# Altium PCB PCB.PcbDoc
Units mil, origin at the board's own origin, x right, y up, seen from the top; angles counter-clockwise.
Board outline 6000 x 4000 mil, 2 copper layers (Top Layer, Bottom Layer); 93 components, 67 nets, 259 pads, 0 vias.
Unrouted connection lines stored in the file: 183.
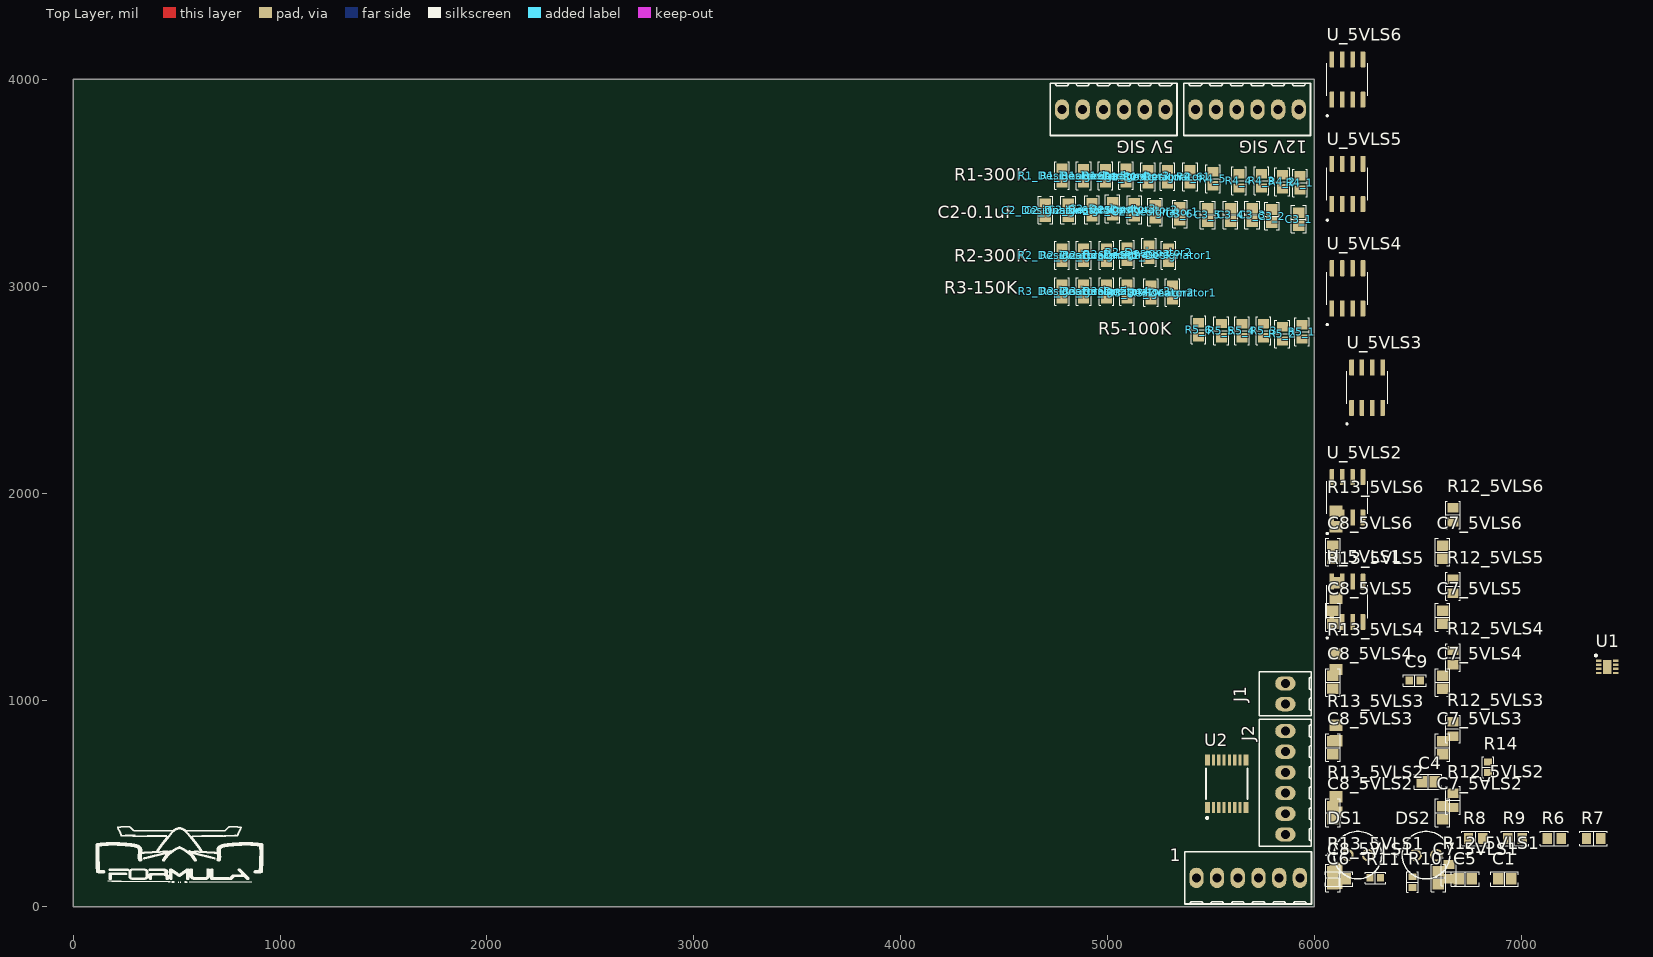
[diagram p0: Top Layer view]
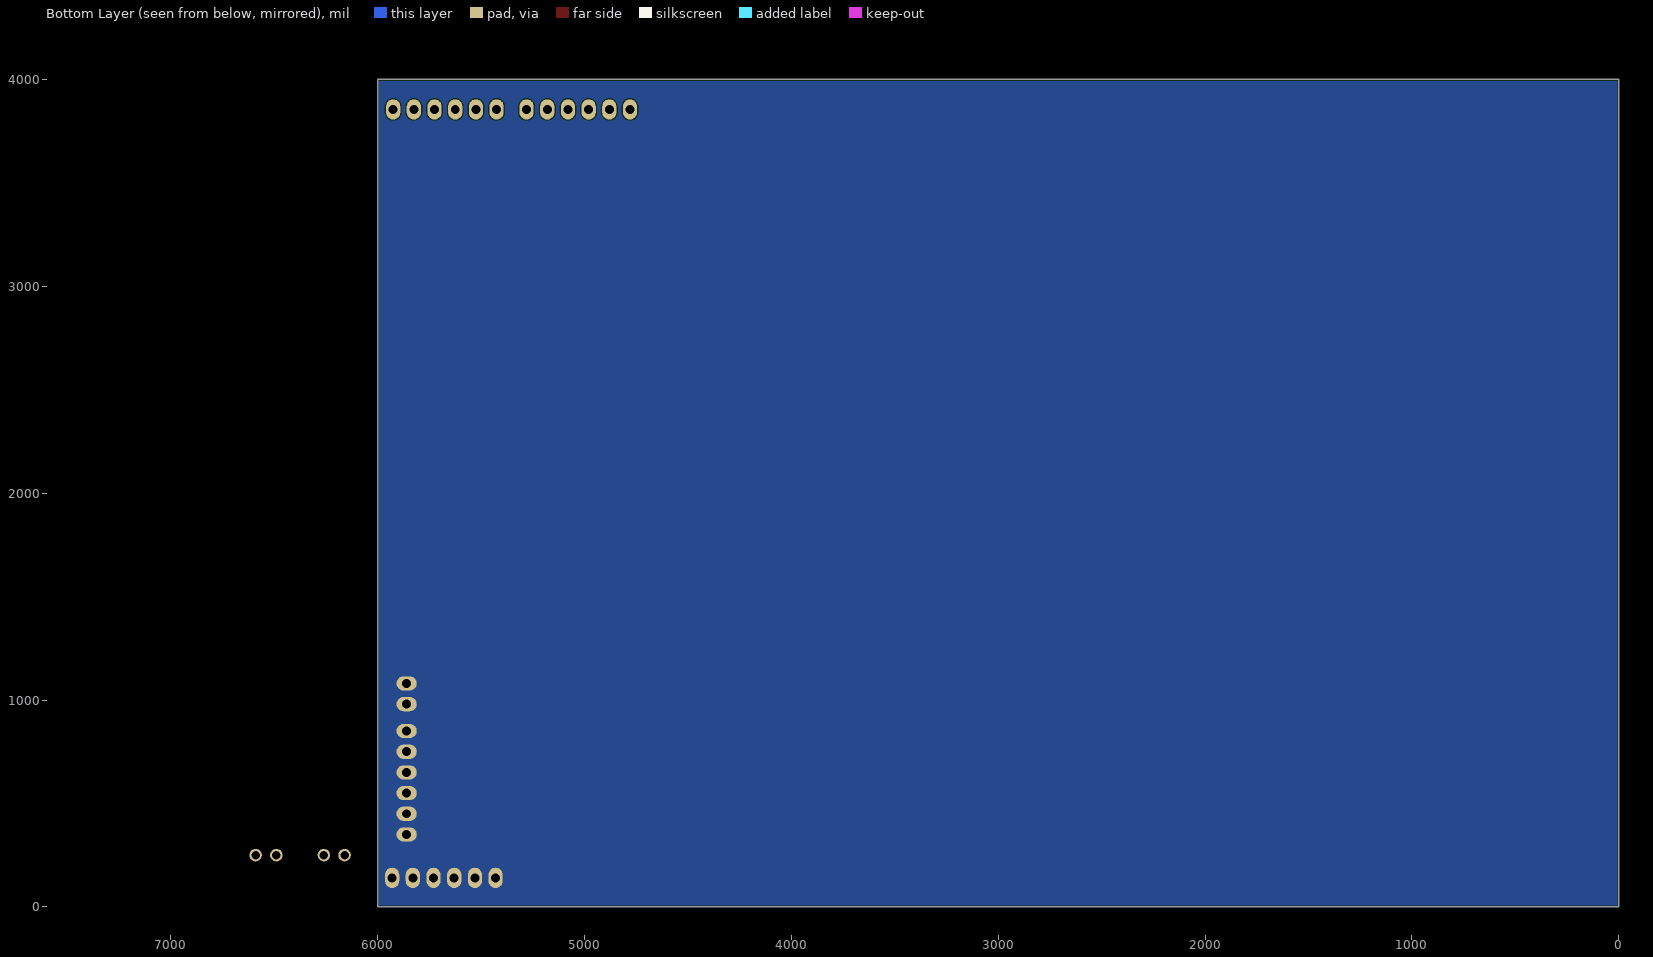
[diagram p1: Bottom Layer view, seen from below]

## Layer stack, top to bottom
Top Solder: solder mask 0.4, Solder Resist, Dk 3.5
Top Layer: signal copper 1.4
Dielectric 1: dielectric 12.6, FR-4, Dk 4.8
Bottom Layer: signal copper 1.4
Bottom Solder: solder mask 0.4, Solder Resist, Dk 3.5

## Board outline
0,0 6000,0 6000,4000 0,4000

## Design rules (kind name [scope] priority, off if disabled: settings)
BoardOutlineClearance [All] p1: gap=7.87 ignorepadtopadclearanceinfootprint=FALSE
Clearance [All] p1: gap=5 ignorepadtopadclearanceinfootprint=FALSE except(9.84: Arc-Hole Track-Hole SMDPad-Hole THPad-Hole Via-Hole Fill-Hole Poly-Hole Region-Hole Text-Hole)
ComponentClearance [All] p1: gap=5 collisioncheckmode=3 verticalgap=5 showdistances=TRUE
DiffPairsRouting [All] p1: maxlimit=10 minlimit=5 mostfreqgap=5 toplayer_minwidth=5 toplayer_maxwidth=1000 toplayer_prefwidth=5 bottomlayer_minwidth=5 bottomlayer_maxwidth=1000 bottomlayer_prefwidth=5 maxuncoupledlength=500
Height [All] p1: minheight=0 maxheight=71497.94 prefheight=500
HoleSize [All] p1: absolutevalues=TRUE maxlimit=248.03 minlimit=11.81 maxpercent=80.000 minpercent=20.000
HoleToHoleClearance [All] p1: gap=9.84 allowstackedmicrovias=FALSE
MinimumAnnularRing [All] p1: minimumring=3
MinimumSolderMaskSliver [All] p1: minsoldermaskwidth=0
PlaneClearance [All] p1: clearance=5
PlaneConnect PlaneConnectPowerPads [InPadClass('PowerPads')] p1: planeconnectstyle=Direct reliefexpansion=20 reliefentries=4 reliefconductorwidth=10 reliefairgap=10
PlaneConnect [All] p2: pad.planeconnectstyle=Relief pad.reliefexpansion=11.81 pad.reliefentries=4 pad.reliefconductorwidth=5 pad.reliefairgap=5 via.planeconnectstyle=Direct via.reliefexpansion=11.81 via.reliefentries=4 via.reliefconductorwidth=5 via.reliefairgap=5
PolygonConnect PolygonConnectPowerPads [All vs (InPadClass('PowerPads'))] p1: connectstyle=Direct reliefconductorwidth=10 reliefentries=4 polygonreliefangle="90 Angle" airgapwidth=10
PolygonConnect [All] p2: thpad.connectstyle=Relief thpad.reliefconductorwidth=5 thpad.reliefentries=4 thpad.polygonreliefangle="90 Angle" thpad.airgapwidth=5 smdpad.connectstyle=Relief smdpad.reliefconductorwidth=5 smdpad.reliefentries=4 smdpad.polygonreliefangle="90 Angle" smdpad.airgapwidth=5 via.connectstyle=Direct via.reliefconductorwidth=5 via.reliefentries=4 via.polygonreliefangle="90 Angle" via.airgapwidth=5
RoutingVias [All] p1: holewidth=11.81 width=23.62 viastyle="Through Hole" minholewidth=11.81 minwidth=23.62 maxholewidth=23.62 maxwidth=259.84
SilkToSilkClearance [All] p1: silktosilkclearance=0
SilkToSolderMaskClearance [IsPad] p1: minsilkscreentomaskgap=5 clearancetoexposedcopper=TRUE
SolderMaskExpansion [All] p1: expansion=2.95 istentingtop=FALSE
Width [All] p1: maxlimit=1000 minlimit=5 preferedwidth=5 minimp=50.000000 maximp=50.000000 favimp=50.000000
20 further rules are at their usual default settings.

## Classes and differential pairs
channel class 5V_LS: 5VLS1 5VLS2 5VLS3 5VLS4 5VLS5 5VLS6
component class "Shift Register": U2
component class 5VLS6: C7_5VLS6 C8_5VLS6 R12_5VLS6 R13_5VLS6 U_5VLS6
component class 5VLS5: C7_5VLS5 C8_5VLS5 R12_5VLS5 R13_5VLS5 U_5VLS5
component class 5VLS4: C7_5VLS4 C8_5VLS4 R12_5VLS4 R13_5VLS4 U_5VLS4
component class 5VLS3: C7_5VLS3 C8_5VLS3 R12_5VLS3 R13_5VLS3 U_5VLS3
component class 5VLS2: C7_5VLS2 C8_5VLS2 R12_5VLS2 R13_5VLS2 U_5VLS2
component class 5VLS1: C7_5VLS1 C8_5VLS1 R12_5VLS1 R13_5VLS1 U_5VLS1
channel class 12_TO_3V3_VOLTAGE_DIVIDER: 1 2 3 4 5 6
component class 6: C3_6 R4_6 R5_6
component class 5: C3_5 R4_5 R5_5
component class 4: C3_4 R4_4 R5_4
component class 3: C3_3 R4_3 R5_3
component class 2: C3_2 R4_2 R5_2
component class 1: C3_1 R4_1 R5_1
channel class 5V_TO_3V_VD: Designator1 Designator2 Designator3 Designator4 Designator5 Designator6
component class Designator: "5V SIG"
component class Designator6: C2_Designator6 R1_Designator6 R2_Designator6 R3_Designator6
component class Designator5: C2_Designator5 R1_Designator5 R2_Designator5 R3_Designator5
component class Designator4: C2_Designator4 R1_Designator4 R2_Designator4 R3_Designator4
component class Designator3: C2_Designator3 R1_Designator3 R2_Designator3 R3_Designator3
component class Designator2: C2_Designator2 R1_Designator2 R2_Designator2 R3_Designator2
component class Designator1: C2_Designator1 R1_Designator1 R2_Designator1 R3_Designator1

## Components (designator, comment, footprint, x,y, rotation, side; value= is the part's Value field where it differs from the comment)
1 "282834-6" "TE 282834-6" 5680,140 r180 top
"5V SIG" "282834-6" "TE 282834-6" 5030,3855 r0 top
"12V SIG" "282834-6" "TE 282834-6" 5675,3855 r0 top
C1 "1µF" "CAP 0805_2012" 6920,135 r0 top
C2_Designator1 "0.1 µF" "CAP 0805_2012" 5230,3360 r90 top (schematic designator C2)
C2_Designator2 "0.1 µF" "CAP 0805_2012" 5130,3370 r90 top (schematic designator C2)
C2_Designator3 "0.1 µF" "CAP 0805_2012" 5025,3375 r90 top (schematic designator C2)
C2_Designator4 "0.1 µF" "CAP 0805_2012" 4925,3370 r90 top (schematic designator C2)
C2_Designator5 "0.1 µF" "CAP 0805_2012" 4810,3368.5 r90 top (schematic designator C2)
C2_Designator6 "0.1 µF" "CAP 0805_2012" 4700,3368.5 r90 top (schematic designator C2)
C3_1 "0.1 µF" "CAP 0805_2012" 5925,3325 r90 top (schematic designator C3)
C3_2 "0.1 µF" "CAP 0805_2012" 5795,3340 r90 top (schematic designator C3)
C3_3 "0.1 µF" "CAP 0805_2012" 5700,3345 r90 top (schematic designator C3)
C3_4 "0.1 µF" "CAP 0805_2012" 5595,3345 r90 top (schematic designator C3)
C3_5 "0.1 µF" "CAP 0805_2012" 5485,3345 r90 top (schematic designator C3)
C3_6 "0.1 µF" "CAP 0805_2012" 5350,3350 r90 top (schematic designator C3)
C4 "1µF" "CAP 0805_2012" 6550,605 r0 top
C5 "0.22µF" "CAP 0805_2012" 6730,135 r0 top
C6 "0.1 µF" "CAP 0805_2012" 6120,135 r0 top
C7_5VLS1 "1µF" "CAP 0805_2012" 6600,140 r90 top (schematic designator C7)
C7_5VLS2 "1µF" "CAP 0805_2012" 6620,455 r90 top (schematic designator C7)
C7_5VLS3 "1µF" "CAP 0805_2012" 6620,770 r90 top (schematic designator C7)
C7_5VLS4 "1µF" "CAP 0805_2012" 6620,1085 r90 top (schematic designator C7)
C7_5VLS5 "1µF" "CAP 0805_2012" 6620,1400 r90 top (schematic designator C7)
C7_5VLS6 "1µF" "CAP 0805_2012" 6620,1715 r90 top (schematic designator C7)
C8_5VLS1 "0.1 µF" "CAP 0805_2012" 6090,140 r90 top (schematic designator C8)
C8_5VLS2 "0.1 µF" "CAP 0805_2012" 6090,455 r90 top (schematic designator C8)
C8_5VLS3 "0.1 µF" "CAP 0805_2012" 6090,770 r90 top (schematic designator C8)
C8_5VLS4 "0.1 µF" "CAP 0805_2012" 6090,1085 r90 top (schematic designator C8)
C8_5VLS5 "0.1 µF" "CAP 0805_2012" 6090,1400 r90 top (schematic designator C8)
C8_5VLS6 "0.1 µF" "CAP 0805_2012" 6090,1715 r90 top (schematic designator C8)
C9 "0.1 µF" "CAP 0603_1608" 6485,1095 r0 top
DS1 "HLMP-4740" AVAG-HLMP-4740 6210,250 r0 top
DS2 "HLMP-4740" AVAG-HLMP-4740 6540,250 r0 top
J1 "282834-2" "TE 282834-2" 5860,1030 r270 top
J2 "282834-6" "TE 282834-6" 5860,600 r270 top
R1_Designator1 "300 kOhms" "RES 0805_2012" 5290,3530.55 r90 top (schematic designator R1)
R1_Designator2 "300 kOhms" "RES 0805_2012" 5195,3530 r90 top (schematic designator R1)
R1_Designator3 "300 kOhms" "RES 0805_2012" 5090,3535.55 r90 top (schematic designator R1)
R1_Designator4 "300 kOhms" "RES 0805_2012" 4990,3535 r90 top (schematic designator R1)
R1_Designator5 "300 kOhms" "RES 0805_2012" 4885,3535 r90 top (schematic designator R1)
R1_Designator6 "300 kOhms" "RES 0805_2012" 4780,3535.55 r90 top (schematic designator R1)
R2_Designator1 "300 kOhms" "RES 0805_2012" 5295,3150 r90 top (schematic designator R2)
R2_Designator2 "300 kOhms" "RES 0805_2012" 5200,3165 r90 top (schematic designator R2)
R2_Designator3 "300 kOhms" "RES 0805_2012" 5095,3155 r90 top (schematic designator R2)
R2_Designator4 "300 kOhms" "RES 0805_2012" 4995,3150 r90 top (schematic designator R2)
R2_Designator5 "300 kOhms" "RES 0805_2012" 4885,3150 r90 top (schematic designator R2)
R2_Designator6 "300 kOhms" "RES 0805_2012" 4780,3150.55 r270 top (schematic designator R2)
R3_Designator1 "150 kOhms" "RES 0805_2012" 5315,2970 r90 top (schematic designator R3)
R3_Designator2 "150 kOhms" "RES 0805_2012" 5210,2970 r90 top (schematic designator R3)
R3_Designator3 "150 kOhms" "RES 0805_2012" 5095,2975 r90 top (schematic designator R3)
R3_Designator4 "150 kOhms" "RES 0805_2012" 4995,2975 r90 top (schematic designator R3)
R3_Designator5 "150 kOhms" "RES 0805_2012" 4885,2975 r90 top (schematic designator R3)
R3_Designator6 "150 kOhms" "RES 0805_2012" 4780,2975 r90 top (schematic designator R3)
R4_1 "300 kOhms" "RES 0805_2012" 5930,3500 r90 top (schematic designator R4)
R4_2 "300 kOhms" "RES 0805_2012" 5845,3505.55 r90 top (schematic designator R4)
R4_3 "300 kOhms" "RES 0805_2012" 5745,3510 r90 top (schematic designator R4)
R4_4 "300 kOhms" "RES 0805_2012" 5635,3510 r90 top (schematic designator R4)
R4_5 "300 kOhms" "RES 0805_2012" 5510,3520 r90 top (schematic designator R4)
R4_6 "300 kOhms" "RES 0805_2012" 5400,3530 r90 top (schematic designator R4)
R5_1 "100 kOhms" "RES 0805_2012" 5940,2780 r90 top (schematic designator R5)
R5_2 "100 kOhms" "RES 0805_2012" 5845,2770 r90 top (schematic designator R5)
R5_3 "100 kOhms" "RES 0805_2012" 5755,2785 r90 top (schematic designator R5)
R5_4 "100 kOhms" "RES 0805_2012" 5650,2785 r90 top (schematic designator R5)
R5_5 "100 kOhms" "RES 0805_2012" 5550,2785.55 r90 top (schematic designator R5)
R5_6 "100 kOhms" "RES 0805_2012" 5440,2790 r90 top (schematic designator R5)
R6 "3 kOhms" "RES 0805_2012" 7160,330 r0 top
R7 "3 kOhms" "RES 0805_2012" 7350,330 r0 top
R8 "2 kOhms" "RES 0805_2012" 6780,330 r0 top
R9 "2 kOhms" "RES 0805_2012" 6970,330 r0 top
R10 "100 kOhms" "RES 0603_1608" 6475,120 r90 top
R11 "10 kOhms" "RES 0603_1608" 6295,140 r0 top
R12_5VLS1 "10 kOhms" "RES 0805_2012" 6650,170 r90 top (schematic designator R12)
R12_5VLS2 "10 kOhms" "RES 0805_2012" 6670,515 r90 top (schematic designator R12)
R12_5VLS3 "10 kOhms" "RES 0805_2012" 6670,860 r90 top (schematic designator R12)
R12_5VLS4 "10 kOhms" "RES 0805_2012" 6670,1205 r90 top (schematic designator R12)
R12_5VLS5 "10 kOhms" "RES 0805_2012" 6670,1550 r90 top (schematic designator R12)
R12_5VLS6 "10 kOhms" "RES 0805_2012" 6670,1895 r90 top (schematic designator R12)
R13_5VLS1 "5.62 kOhms" RESC2013X60X40ML20T25 6105,150 r90 top (schematic designator R13)
R13_5VLS2 "5.62 kOhms" RESC2013X60X40ML20T25 6105,495 r90 top (schematic designator R13)
R13_5VLS3 "5.62 kOhms" RESC2013X60X40ML20T25 6105,840 r90 top (schematic designator R13)
R13_5VLS4 "5.62 kOhms" RESC2013X60X40ML20T25 6105,1185 r90 top (schematic designator R13)
R13_5VLS5 "5.62 kOhms" RESC2013X60X40ML20T25 6105,1530 r90 top (schematic designator R13)
R13_5VLS6 "5.62 kOhms" RESC2013X60X40ML20T25 6105,1875 r90 top (schematic designator R13)
R14 "100 kOhms" "RES 0603_1608" 6840,675 r90 top
U1 "NCP45524IMNTWG-H" SON50P200X200X100-9N 7416.34,1160.16 r0 top
U2 "74HC595PW,118" FP-SOT403-1-MFG 5576.5,595.16 r90 top
U_5VLS1 "ST890CDR" SOIC127P600X175-8N 6160,1475 r90 top (schematic designator U)
U_5VLS2 "ST890CDR" SOIC127P600X175-8N 6160,1980 r90 top (schematic designator U)
U_5VLS3 "ST890CDR" SOIC127P600X175-8N 6255,2510 r90 top (schematic designator U)
U_5VLS4 "ST890CDR" SOIC127P600X175-8N 6160,2990 r90 top (schematic designator U)
U_5VLS5 "ST890CDR" SOIC127P600X175-8N 6160,3495 r90 top (schematic designator U)
U_5VLS6 "ST890CDR" SOIC127P600X175-8N 6160,4000 r90 top (schematic designator U)

## Footprints (in the part's own frame and the unit in brackets; to place one, negate y for a bottom-side part, rotate by r counter-clockwise, add the part's x,y. Pads: shape width x height; smd on the part's side, far side on the other; paste and mask are expansions set on the pad)
AVAG-HLMP-4740 [mm] "THD, 2-Leads, Dia 5.845mm, Pitch 2.54mm"
  round 1.55 hole 1.05: 1(-1.27,0) 2(1.27,0)
  silkscreen extent -3.92,-2.92 2.92,2.92
"CAP 0603_1608" [mm] "Chip Capacitor, 2-Leads, Body 1.60x0.80mm, IPC Medium Density"
  rect 0.9x1 smd: 1(-0.675,0) 2(0.675,0)
  silkscreen extent -1.4,-0.7 1.4,0.7, body extent -0.8,-0.41 0.8,0.41, height 0.82
"CAP 0805_2012" [mm] "Chip Capacitor, 2-Leads, Body 2.00x1.20mm, IPC Medium Density"
  rect 1.3x1.4 smd: 1(-0.8,0) 2(0.8,0)
  silkscreen extent -1.7,-0.9 1.7,0.9, body extent -1,-0.64 1,0.64, height 1.26
FP-SOT403-1-MFG [mm]
  rect 1.35x0.6 smd paste-1000 mask+0: 1(-2.925,2.375) 8(-2.925,-2.375) 9(2.925,-2.375) 16(2.925,2.375)
  rect 1.35x0.4 smd paste-1000 mask+0: 2(-2.925,1.625) 3(-2.925,0.975) 4(-2.925,0.325) 5(-2.925,-0.325) 6(-2.925,-0.975) 7(-2.925,-1.625) 10(2.925,-1.625) 11(2.925,-0.975) 12(2.925,-0.325) 13(2.925,0.325) 14(2.925,0.975) 15(2.925,1.625)
  silkscreen extent -4.32,-2.55 1.88,2.55, body extent -3.72,-2.9 3.72,2.9, height 0.25
"RES 0603_1608" [mm] "Chip Resistor, 2-Leads, Body 1.60x0.80mm, IPC Medium Density"
  rect 0.85x0.95 smd: 1(-0.65,0) 2(0.65,0)
  silkscreen extent -1.27,-0.7 1.27,0.7, body extent -0.8,-0.4 0.8,0.4, height 0.45
"RES 0805_2012" [mm] "Chip Resistor, 2-Leads, Body 2.00x1.25mm, IPC Medium Density"
  rect 1.15x1.35 smd: 1(-0.875,0) 2(0.875,0)
  silkscreen extent -1.7,-0.9 1.7,0.9, body extent -1,-0.62 1,0.63, height 0.6
RESC2013X60X40ML20T25 [mm] "Chip Resistor, 2-Leads, Body 2.00x1.25mm, IPC Low Density"
  rect 1.4x1.55 smd: 1(-0.95,0) 2(0.95,0)
  body extent -1.1,-0.72 1.1,0.72, height 0.6
SOIC127P600X175-8N [mm]
  rrect25% 1.97x0.57 smd: 1(-2.475,1.905) 2(-2.475,0.635) 3(-2.475,-0.635) 4(-2.475,-1.905) 5(2.475,-1.905) 6(2.475,-0.635) 7(2.475,0.635) 8(2.475,1.905)
  silkscreen extent -4.54,-2.51 2,2.57
SON50P200X200X100-9N [mm]
  rect 0.7x0.3 smd: 1(-1.05,0.75) 2(-1.05,0.25) 3(-1.05,-0.25) 4(-1.05,-0.75) 5(1.05,-0.75) 6(1.05,-0.25) 7(1.05,0.25) 8(1.05,0.75)
  rect 1x1.7 smd: 9(0,0)
  silkscreen extent -1.52,1.28 -1.27,1.52
"TE 282834-2" [mm]
  oval 1.75x2.5 hole 1.1: 1(-1.27,0) 2(1.27,0)
  silkscreen extent -2.7,-3.2 2.7,3.2, body extent -2.77,-3.25 2.77,3.25, height 10
"TE 282834-6" [mm]
  oval 1.75x2.5 hole 1.1: 1(-6.35,0) 2(-3.81,0) 3(-1.27,0) 4(1.27,0) 5(3.81,0) 6(6.35,0)
  silkscreen extent -7.78,-3.2 7.78,3.2, body extent -7.85,-3.25 7.85,3.25, height 10

## Part data
1 "5V SIG" "12V SIG" J2: "TERM BLK 6P SIDE ENT 2.54MM PCB", Color=Green, Current=10A, Manufacturer="TE Connectivity AMP Connectors", Supplier Part Number 1=A98337-ND, Voltage=150V, ComponentLink1Description=Datasheet, ComponentLink1URL=https://www.te.com/commerce/DocumentDelivery/DDEController?Action=srchrtrv&DocNm=282834&DocType=Customer+Drawing&DocLang=English, ComponentLink2Description="DigiKey Link", ComponentLink2URL=http://digikey.com/product-detail/en/te-connectivity-amp-connectors/282834-6/A98337-ND/1153267, LastUpdated="2020-01-15 4:16:31 AM", Lifecycle Status=Active, Mating Orientation="Horizontal with Board", Minimum Order=1, Mounting Type="Through Hole", Number of Levels=1, Packaging=Bulk, Part Number=282834-6, Part Status=Active, Pitch="0.100\" (2.54mm)", Positions Per Level=6, Price=4.72, Series=Buchanan, Supplier 1=DigiKey, Wire Gauge="16-30 AWG", Wire Termination="Screw - Rising Cage Clamp"
C1 C4: library part LGC26D105MAT2S1, "CAP CER 1UF 6.3V X5R 0805", Device Package="0805 (2012 Metric)", Manufacturer="AVX Corporation", Operating Temperature="-55°C ~ 85°C", Supplier Part Number 1=478-6694-1-ND, Temperature Coefficient=X5R, Tolerance=±20%, Voltage - Rated=6.3V, Applications="Bypass, Decoupling", Capacitance=1µF, ComponentLink1Description=Datasheet, ComponentLink1URL=http://datasheets.avx.com/LGA.pdf, ComponentLink2Description="DigiKey Link", ComponentLink2URL=http://digikey.com/product-detail/en/avx-corporation/LGC26D105MAT2S1/478-6694-1-ND/2694148, Features="Low ESL (Multi-Terminal)", LastUpdated="2020-09-02 1:04:42 AM", Lifecycle Status=Active, Minimum Order=1, Mounting Type="Surface Mount, MLCC", Package / Case="0805 (2012 Metric)", Packaging=TapeAndReel, Part Number=LGC26D105MAT2S1, Part Status=Active, partid=2463, Price=0.63, Series="LGC2 (LGA)", Size / Dimension="0.081\" L x 0.052\" W (2.06mm x 1.32mm)", Supplier 1=DigiKey, Thickness (Max)="0.022\" (0.55mm)"
C2_Designator1 C2_Designator2 C2_Designator3 C2_Designator4 C2_Designator5 C2_Designator6 C3_1 C3_2 C3_3 C3_4 C3_5 C3_6 C6: library part CC0805MRX7R9BB104, "CAP CER 0.1UF 50V X7R 0805", Device Package="0805 (2012 Metric)", Manufacturer=Yageo, Operating Temperature="-55°C ~ 125°C", Supplier Part Number 1=311-4351-1-ND, Temperature Coefficient=X7R, Tolerance=±20%, Voltage - Rated=50V, Applications="General Purpose", Capacitance="0.1 µF", ComponentLink1Description=Datasheet, ComponentLink1URL=https://www.yageo.com/upload/media/product/productsearch/datasheet/mlcc/UPY-GPHC_X7R_6.3V-to-50V_18.pdf, ComponentLink2Description="DigiKey Link", ComponentLink2URL=https://www.digikey.com/en/products/detail/yageo/CC0805MRX7R9BB104/5884281, LastUpdated="2023-10-02 7:13:07 PM", Lifecycle Status=Active, Minimum Order=1, Mounting Type="Surface Mount, MLCC", Package / Case="0805 (2012 Metric)", Packaging=TapeAndReel, Part Number=CC0805MRX7R9BB104, Part Status=Active, partid=2475, Price=0.01, Series=CC, Size / Dimension="0.079\" L x 0.049\" W (2.00mm x 1.25mm)", Supplier 1=DigiKey, Thickness (Max)="0.037\" (0.95mm)"
C5: library part MM055C224KCZ2A, "CAP CER 0.22UF 50V X7R 0805", Device Package="0805 (2012 Metric)", Manufacturer="AVX Corporation", Operating Temperature="-55°C ~ 125°C", Supplier Part Number 1=478-10609-1-ND, Temperature Coefficient=X7R, Tolerance=±10%, Voltage - Rated=50V, Applications="Medical, Non-Critical", Capacitance=0.22µF, ComponentLink1Description=Datasheet, ComponentLink1URL=http://datasheets.avx.com/AVX-MM.pdf, ComponentLink2Description="DigiKey Link", ComponentLink2URL=http://digikey.com/product-detail/en/avx-corporation/MM055C224KCZ2A/478-10609-1-ND/7344870, LastUpdated="2020-09-02 1:04:42 AM", Lifecycle Status=Active, Minimum Order=1, Mounting Type="Surface Mount, MLCC", Package / Case="0805 (2012 Metric)", Packaging=TapeAndReel, Part Number=MM055C224KCZ2A, Part Status=Active, partid=2435, Price=0.50, Series=MM, Size / Dimension="0.079\" L x 0.049\" W (2.01mm x 1.25mm)", Supplier 1=DigiKey, Thickness (Max)="0.029\" (0.74mm)"
C7_5VLS1 C7_5VLS2 C7_5VLS3 C7_5VLS4 C7_5VLS5 C7_5VLS6: library part MM05ZC105KCZ2A, "CAP CER 1UF 10V X7R 0805", Part Number=MM05ZC105KCZ2A
C8_5VLS1 C8_5VLS2 C8_5VLS3 C8_5VLS4 C8_5VLS5 C8_5VLS6: library part CC0805MRX7R9BB104, "CAP CER 0.1UF 50V X7R 0805", Part Number=CC0805MRX7R9BB104
C9: library part C0603C104K5RAC7411, "CAP CER 0.1UF 50V X7R 0603", Device Package="0603 (1608 Metric)", Manufacturer=KEMET, Operating Temperature="-55°C ~ 125°C", Supplier Part Number 1=399-C0603C104K5RAC7411CT-ND, Temperature Coefficient=X7R, Tolerance=±10%, Voltage - Rated=50V, Applications="Bypass, Decoupling", Capacitance="0.1 µF", ComponentLink1Description=Datasheet, ComponentLink1URL=https://api.kemet.com/component-edge/download/datasheet/C0603C104K5RAC7411.pdf, ComponentLink2Description="DigiKey Link", ComponentLink2URL=https://www.digikey.com/en/products/detail/kemet/C0603C104K5RAC7411/3317013, LastUpdated="2023-06-20 7:12:54 PM", Lifecycle Status=Active, Minimum Order=1, Mounting Type="Surface Mount, MLCC", Package / Case="0603 (1608 Metric)", Packaging=TapeAndReel, Part Number=C0603C104K5RAC7411, Part Status=Active, partid=2233, Price=0.01, Series="SMD Comm X7R", Size / Dimension="0.063\" L x 0.031\" W (1.60mm x 0.80mm)", Supplier 1=DigiKey, Thickness (Max)="0.035\" (0.90mm)"
DS1 DS2: library part CMP-2000-06413-1, "T-1 3/4 (5 mm) Low Current LED Lamp, Green, 1.9 V, -20 to 100 degC, 2-Pin THD, RoHS, Bulk", Color=Green, Dominant Wavelength/Color Temperature=569nm, Manufacturer=AvagoTechnologies, Package=2T-13/4, Package Description="2-Pin Through Hole Device, Dia 5.845 mm, Pitch 2.54 mm", Category=LEDs, Datasheet URL=http://docs.avagotech.com/docs/AV02-1557EN, Datasheet Version=07/2014, Intensity=2.3mcd, Lens Appearance=ColoredDiffused, Lens Shape Type=Circular, Manufacturer URL=http://www.avagotech.com/, Mounting=ThroughHole, Mounting Orientation=TopMount, Mounting Technology=ThroughHole, Number of LEDs=1, Package Reference=HLMP-4740, Packaging=Bulk, Peak Wavelength=565nm, Pin Count=2, Rad Hard=No, Type=Uni-Color, Viewing Angle=50°
J1: "TERM BLK 2P SIDE ENT 2.54MM PCB", Color=Green, Current=10A, Manufacturer="TE Connectivity AMP Connectors", Supplier Part Number 1=A98333-ND, Voltage=150V, ComponentLink1Description=Datasheet, ComponentLink1URL=https://www.te.com/commerce/DocumentDelivery/DDEController?Action=srchrtrv&DocNm=282834&DocType=Customer+Drawing&DocLang=English, ComponentLink2Description="DigiKey Link", ComponentLink2URL=http://digikey.com/product-detail/en/te-connectivity-amp-connectors/282834-2/A98333-ND/1150135, LastUpdated="2020-01-15 4:15:38 AM", Lifecycle Status=Active, Mating Orientation="Horizontal with Board", Minimum Order=1, Mounting Type="Through Hole", Number of Levels=1, Packaging=Bulk, Part Number=282834-2, Part Status=Active, Pitch="0.100\" (2.54mm)", Positions Per Level=2, Price=0.88, Series=Buchanan, Supplier 1=DigiKey, Wire Gauge="16-30 AWG", Wire Termination="Screw - Rising Cage Clamp"
R1_Designator1 R1_Designator2 R1_Designator3 R1_Designator4 R1_Designator5 R1_Designator6 R2_Designator1 R2_Designator2 R2_Designator3 R2_Designator4 R2_Designator5 R2_Designator6 R4_1 R4_2 R4_3 R4_4 R4_5 R4_6: library part CRCW0805300KJNEA, "RES SMD 300K OHM 5% 1/8W 0805", Device Package="0805 (2012 Metric)", Manufacturer="Vishay Dale", Operating Temperature="-55°C ~ 155°C", Power (Watts)="0.125W, 1/8W", Ratings=AEC-Q200, Supplier Device Package=0805, Supplier Part Number 1=541-300KACT-ND, Temperature Coefficient=±200ppm/°C, Tolerance=±5%, ComponentLink1Description=Datasheet, ComponentLink1URL=http://www.vishay.com/docs/20035/dcrcwe3.pdf, ComponentLink2Description="DigiKey Link", ComponentLink2URL=https://www.digikey.com/en/products/detail/vishay-dale/CRCW0805300KJNEA/1175257, Composition="Thick Film", Features="Automotive AEC-Q200", Height - Seated (Max)="0.020\" (0.50mm)", LastUpdated="2023-10-02 7:52:37 PM", Lifecycle Status=Active, Minimum Order=1, Number of Terminations=2, Package / Case="0805 (2012 Metric)", Packaging=TapeAndReel, Part Number=CRCW0805300KJNEA, Part Status=Active, partid=29510, Price=0.01, Resistance="300 kOhms", Series=CRCW, Size / Dimension="0.079\" L x 0.049\" W (2.00mm x 1.25mm)", Supplier 1=DigiKey
R3_Designator1 R3_Designator2 R3_Designator3 R3_Designator4 R3_Designator5 R3_Designator6: library part RT0805DRD07150KL, "RES SMD 150K OHM 0.5% 1/8W 0805", Device Package="0805 (2012 Metric)", Manufacturer=Yageo, Operating Temperature="-55°C ~ 155°C", Power (Watts)="0.125W, 1/8W", Supplier Device Package=0805, Supplier Part Number 1=311-2706-1-ND, Temperature Coefficient=±25ppm/°C, Tolerance=±0.5%, ComponentLink1Description=Datasheet, ComponentLink1URL=https://www.yageo.com/upload/media/product/productsearch/datasheet/rchip/PYu-RT_1-to-0.01_RoHS_L_11.pdf, ComponentLink2Description="DigiKey Link", ComponentLink2URL=https://www.digikey.com/en/products/detail/yageo/RT0805DRD07150KL/1077874, Composition="Thin Film", Height - Seated (Max)="0.024\" (0.60mm)", LastUpdated="2023-10-02 7:52:44 PM", Lifecycle Status=Active, Minimum Order=1, Number of Terminations=2, Package / Case="0805 (2012 Metric)", Packaging=TapeAndReel, Part Number=RT0805DRD07150KL, Part Status=Active, partid=27806, Price=0.02, Resistance="150 kOhms", Series=RT, Size / Dimension="0.079\" L x 0.049\" W (2.00mm x 1.25mm)", Supplier 1=DigiKey
R5_1 R5_2 R5_3 R5_4 R5_5 R5_6: library part CPF0805B100KE, "RES SMD 100K OHM 0.1% 1/10W 0805", Device Package="0805 (2012 Metric)", Manufacturer="TE Connectivity Passive Product", Operating Temperature="-55°C ~ 155°C", Power (Watts)="0.1W, 1/10W", Supplier Device Package=0805, Supplier Part Number 1=A106042CT-ND, Temperature Coefficient=±25ppm/°C, Tolerance=±0.1%, ComponentLink1Description=Datasheet, ComponentLink1URL=https://www.te.com/commerce/DocumentDelivery/DDEController?Action=srchrtrv&DocNm=1773200&DocType=DS&DocLang=English, ComponentLink2Description="DigiKey Link", ComponentLink2URL=https://www.digikey.com/en/products/detail/te-connectivity-passive-product/CPF0805B100KE/2389788, Composition="Thin Film", Height - Seated (Max)="0.026\" (0.65mm)", LastUpdated="2023-10-02 7:52:44 PM", Lifecycle Status=Active, Minimum Order=1, Number of Terminations=2, Package / Case="0805 (2012 Metric)", Packaging=TapeAndReel, Part Number=CPF0805B100KE, Part Status=Active, partid=27729, Price=0.09, Resistance="100 kOhms", Series="CPF, Neohm", Size / Dimension="0.079\" L x 0.049\" W (2.00mm x 1.25mm)", Supplier 1=DigiKey
R6 R7: library part RT0805DRD073KL, "RES SMD 3K OHM 0.5% 1/8W 0805", Device Package="0805 (2012 Metric)", Manufacturer=Yageo, Operating Temperature="-55°C ~ 155°C", Power (Watts)="0.125W, 1/8W", Supplier Device Package=0805, Supplier Part Number 1=311-2744-1-ND, Temperature Coefficient=±25ppm/°C, Tolerance=±0.5%, ComponentLink1Description=Datasheet, ComponentLink1URL=https://www.yageo.com/upload/media/product/productsearch/datasheet/rchip/PYu-RT_1-to-0.01_RoHS_L_11.pdf, ComponentLink2Description="DigiKey Link", ComponentLink2URL=https://www.digikey.com/en/products/detail/yageo/RT0805DRD073KL/1078142, Composition="Thin Film", Height - Seated (Max)="0.024\" (0.60mm)", LastUpdated="2023-10-02 7:52:44 PM", Lifecycle Status=Active, Minimum Order=1, Number of Terminations=2, Package / Case="0805 (2012 Metric)", Packaging=TapeAndReel, Part Number=RT0805DRD073KL, Part Status=Active, partid=27799, Price=0.02, Resistance="3 kOhms", Series=RT, Size / Dimension="0.079\" L x 0.049\" W (2.00mm x 1.25mm)", Supplier 1=DigiKey
R8 R9: library part RCS08052K00FKEA, "RES SMD 2K OHM 1% 1/2W 0805", Device Package="0805 (2012 Metric)", Manufacturer="Vishay Dale", Operating Temperature="-55°C ~ 155°C", Power (Watts)="0.5W, 1/2W", Ratings=AEC-Q200, Supplier Device Package=0805, Supplier Part Number 1=541-2840-1-ND, Temperature Coefficient=±100ppm/°C, Tolerance=±1%, ComponentLink1Description=Datasheet, ComponentLink1URL=http://www.vishay.com/docs/20065/rcse3.pdf, ComponentLink2Description="DigiKey Link", ComponentLink2URL=https://www.digikey.com/en/products/detail/vishay-dale/RCS08052K00FKEA/5866986, Composition="Thick Film", Features="Automotive AEC-Q200, Pulse Withstanding", Height - Seated (Max)="0.020\" (0.50mm)", LastUpdated="2023-10-02 7:52:44 PM", Lifecycle Status=Active, Minimum Order=1, Number of Terminations=2, Package / Case="0805 (2012 Metric)", Packaging=TapeAndReel, Part Number=RCS08052K00FKEA, Part Status=Active, partid=27786, Price=0.02, Resistance="2 kOhms", Series="RCS e3", Size / Dimension="0.079\" L x 0.049\" W (2.00mm x 1.25mm)", Supplier 1=DigiKey
R10 R14: library part RNCS0603BKE100K, "RES 100K OHM 0.1% 1/16W 0603", Device Package="0603 (1608 Metric)", Manufacturer="Stackpole Electronics Inc", Operating Temperature="-55°C ~ 155°C", Power (Watts)="0.063W, 1/16W", Ratings=AEC-Q200, Supplier Device Package=0603, Supplier Part Number 1=RNCS0603BKE100KCT-ND, Temperature Coefficient=±25ppm/°C, Tolerance=±0.1%, ComponentLink1Description=Datasheet, ComponentLink1URL=https://www.seielect.com/catalog/sei-rncs_rnch.pdf, ComponentLink2Description="DigiKey Link", ComponentLink2URL=https://www.digikey.com/en/products/detail/stackpole-electronics-inc/RNCS0603BKE100K/1708835, Composition="Thin Film", Features="Anti-Corrosive, Automotive AEC-Q200, Moisture Resistant", Height - Seated (Max)="0.022\" (0.55mm)", Lifecycle Status=Active, Minimum Order=1, Number of Terminations=2, Package / Case="0603 (1608 Metric)", Packaging=TapeAndReel, Part Number=RNCS0603BKE100K, Part Status=Active, partid=4849, Price=0.07, Resistance="100 kOhms", Series=RNCS, Size / Dimension="0.061\" L x 0.031\" W (1.55mm x 0.80mm)", Supplier 1=DigiKey
  R10: LastUpdated="2023-06-04 7:36:27 PM"
  R14: LastUpdated="2023-06-08 7:45:17 PM"
R11: library part RNCS0603BKE10K0, "RES 10K OHM 0.1% 1/16W 0603", Device Package="0603 (1608 Metric)", Manufacturer="Stackpole Electronics Inc", Operating Temperature="-55°C ~ 155°C", Power (Watts)="0.063W, 1/16W", Ratings=AEC-Q200, Supplier Device Package=0603, Supplier Part Number 1=RNCS0603BKE10K0CT-ND, Temperature Coefficient=±25ppm/°C, Tolerance=±0.1%, ComponentLink1Description=Datasheet, ComponentLink1URL=https://www.seielect.com/catalog/sei-rncs_rnch.pdf, ComponentLink2Description="DigiKey Link", ComponentLink2URL=https://www.digikey.com/en/products/detail/stackpole-electronics-inc/RNCS0603BKE10K0/1708836, Composition="Thin Film", Features="Anti-Corrosive, Automotive AEC-Q200, Moisture Resistant", Height - Seated (Max)="0.022\" (0.55mm)", LastUpdated="2023-06-04 7:36:27 PM", Lifecycle Status=Active, Minimum Order=1, Number of Terminations=2, Package / Case="0603 (1608 Metric)", Packaging=TapeAndReel, Part Number=RNCS0603BKE10K0, Part Status=Active, partid=4838, Price=0.07, Resistance="10 kOhms", Series=RNCS, Size / Dimension="0.061\" L x 0.031\" W (1.55mm x 0.80mm)", Supplier 1=DigiKey
R12_5VLS1 R12_5VLS2 R12_5VLS3 R12_5VLS4 R12_5VLS5 R12_5VLS6: library part RNCS0805BKE10K0, "RES 10K OHM 0.1% 1/10W 0805", Part Number=RNCS0805BKE10K0
R13_5VLS1 R13_5VLS2 R13_5VLS3 R13_5VLS4 R13_5VLS5 R13_5VLS6: library part CMP-2001-00852-1, Manufacturer=Panasonic, Part Number=ERA6AEB5621V
U1: "No Description Available", Mfr_Name=onsemi, Copyright="Copyright (C) 2023 Ultra Librarian. All rights reserved.", Manufacturer_Part_Number=NCP45524IMNTWG-H, RefDes=RefDes, Type=DEV
U2: library part CMP-14351-000004-1, "IC SHIFT REGISTER 8BIT 16TSSOP"
U_5VLS1 U_5VLS2 U_5VLS3 U_5VLS4 U_5VLS5 U_5VLS6: "Power Switch/Driver 1:1 P-Channel 1.2A 8-SO", Package="SOIC-8 STMicroelectronics", Availability=Unavailable, MF=STMicroelectronics, MP=ST890CDR, Price=None, SnapEDA_Link=https://www.snapeda.com/parts/ST890CDR/STMicroelectronics/view-part/496092/?ref=snap

## Nets (pads, with @x,y where several pads share a name; then routed paths per layer and width w, separated by ;. In a path a pad name is that pad's centre, name@x,y a point inside that pad or via, vN(x,y) a via of type N, cw(c..) or ccw(c..) an arc to the next point about the centre after c; other vN are vias at no path point)
GND: 1.1 1.2 1.3 1.4 1.5 1.6 C1.2 C2_Designator1.1 C2_Designator2.1 C2_Designator3.1 C2_Designator4.1 C2_Designator5.1 C2_Designator6.1 C3_1.1 C3_2.1 C3_3.1 C3_4.1 C3_5.1 C3_6.1 C4.2 C5.2 C6.1 C7_5VLS1.1 C7_5VLS2.1 C7_5VLS3.1 C7_5VLS4.1 C7_5VLS5.1 C7_5VLS6.1 C8_5VLS1.1 C8_5VLS2.1 C8_5VLS3.1 C8_5VLS4.1 C8_5VLS5.1 C8_5VLS6.1 C9.2 DS1.2 DS2.2 J1.2 R3_Designator1.1 R3_Designator2.1 R3_Designator3.1 R3_Designator4.1 R3_Designator5.1 R3_Designator6.1 R5_1.1 R5_2.1 R5_3.1 R5_4.1 R5_5.1 R5_6.1 R13_5VLS1.1 R13_5VLS2.1 R13_5VLS3.1 R13_5VLS4.1 R13_5VLS5.1 R13_5VLS6.1 U1.4 U2.8 U2.13 U_5VLS1.4 U_5VLS2.4 U_5VLS3.4 U_5VLS4.4 U_5VLS5.4 U_5VLS6.4
"Net5V SIG_1": "5V SIG.1" R1_Designator6.2
"Net5V SIG_2": "5V SIG.2" R1_Designator5.2
"Net5V SIG_3": "5V SIG.3" R1_Designator4.2
"Net5V SIG_4": "5V SIG.4" R1_Designator3.2
"Net5V SIG_5": "5V SIG.5" R1_Designator2.2
"Net5V SIG_6": "5V SIG.6" R1_Designator1.2
"Net12V SIG_1": "12V SIG.1" R4_6.2
"Net12V SIG_2": "12V SIG.2" R4_5.2
"Net12V SIG_3": "12V SIG.3" R4_4.2
"Net12V SIG_4": "12V SIG.4" R4_3.2
"Net12V SIG_5": "12V SIG.5" R4_2.2
"Net12V SIG_6": "12V SIG.6" R4_1.2
NetC2_Designator1_2: C2_Designator1.2 R1_Designator1.1 R2_Designator1.2
NetC2_Designator2_2: C2_Designator2.2 R1_Designator2.1 R2_Designator2.2
NetC2_Designator3_2: C2_Designator3.2 R1_Designator3.1 R2_Designator3.2
NetC2_Designator4_2: C2_Designator4.2 R1_Designator4.1 R2_Designator4.2
NetC2_Designator5_2: C2_Designator5.2 R1_Designator5.1 R2_Designator5.2
NetC2_Designator6_2: C2_Designator6.2 R1_Designator6.1 R2_Designator6.2
NetC3_1_2: C3_1.2 R4_1.1 R5_1.2
NetC3_2_2: C3_2.2 R4_2.1 R5_2.2
NetC3_3_2: C3_3.2 R4_3.1 R5_3.2
NetC3_4_2: C3_4.2 R4_4.1 R5_4.2
NetC3_5_2: C3_5.2 R4_5.1 R5_5.2
NetC3_6_2: C3_6.2 R4_6.1 R5_6.2
NetC5_1: C5.1 J1.1 R6.2 R11.1 U1.7 U1.8
NetC8_5VLS1_2: C8_5VLS1.2 J2.1 U_5VLS1.6 U_5VLS1.7
NetC8_5VLS2_2: C8_5VLS2.2 J2.2 U_5VLS2.6 U_5VLS2.7
NetC8_5VLS3_2: C8_5VLS3.2 J2.3 U_5VLS3.6 U_5VLS3.7
NetC8_5VLS4_2: C8_5VLS4.2 J2.4 U_5VLS4.6 U_5VLS4.7
NetC8_5VLS5_2: C8_5VLS5.2 J2.5 U_5VLS5.6 U_5VLS5.7
NetC8_5VLS6_2: C8_5VLS6.2 J2.6 U_5VLS6.6 U_5VLS6.7
NetDS1_1: DS1.1 R8.1
NetDS2_1: DS2.1 R9.1
NetR2_Designator1_1: R2_Designator1.1 R3_Designator1.2
NetR2_Designator2_1: R2_Designator2.1 R3_Designator2.2
NetR2_Designator3_1: R2_Designator3.1 R3_Designator3.2
NetR2_Designator4_1: R2_Designator4.1 R3_Designator4.2
NetR2_Designator5_1: R2_Designator5.1 R3_Designator5.2
NetR2_Designator6_1: R2_Designator6.1 R3_Designator6.2 | length 0.8
  Top Layer w5: R3_Designator6.2@4779.45,3010 R3_Designator6.2
NetR6_1: R6.1 R8.2
NetR7_1: R7.1 R9.2
NetR10_1: R10.1 U1.6
NetR11_2: R11.2 U1.5
NetR12_5VLS1_1: R12_5VLS1.1 U2.15 U_5VLS1.3
NetR12_5VLS2_1: R12_5VLS2.1 U2.1 U_5VLS2.3
NetR12_5VLS3_1: R12_5VLS3.1 U2.2 U_5VLS3.3
NetR12_5VLS4_1: R12_5VLS4.1 U2.3 U_5VLS4.3
NetR12_5VLS5_1: R12_5VLS5.1 U2.4 U_5VLS5.3
NetR12_5VLS6_1: R12_5VLS6.1 U2.5 U_5VLS6.3
NetR13_5VLS1_2: R13_5VLS1.2 U_5VLS1.5
NetR13_5VLS2_2: R13_5VLS2.2 U_5VLS2.5
NetR13_5VLS3_2: R13_5VLS3.2 U_5VLS3.5
NetR13_5VLS4_2: R13_5VLS4.2 U_5VLS4.5
NetR13_5VLS5_2: R13_5VLS5.2 U_5VLS5.5
NetR13_5VLS6_2: R13_5VLS6.2 U_5VLS6.5
NetR14_1: R14.1 U_5VLS1.8 U_5VLS2.8 U_5VLS3.8 U_5VLS4.8 U_5VLS5.8 U_5VLS6.8
NetU1_2: U1.2
NetU2_6: U2.6
NetU2_7: U2.7
NetU2_9: U2.9
NetU2_11: U2.11
NetU2_12: U2.12
NetU2_14: U2.14
VCC3V3: C6.2 R10.2 R12_5VLS1.2 R12_5VLS2.2 R12_5VLS3.2 R12_5VLS4.2 R12_5VLS5.2 R12_5VLS6.2 U1.3
VCC5V: C7_5VLS1.2 C7_5VLS2.2 C7_5VLS3.2 C7_5VLS4.2 C7_5VLS5.2 C7_5VLS6.2 C9.1 U2.10 U2.16 U_5VLS1.1 U_5VLS1.2 U_5VLS2.1 U_5VLS2.2 U_5VLS3.1 U_5VLS3.2 U_5VLS4.1 U_5VLS4.2 U_5VLS5.1 U_5VLS5.2 U_5VLS6.1 U_5VLS6.2
VCC12V: C1.1 C4.1 R7.2 R14.2 U1.1 U1.9

## Polygon pours and split planes (outlines as drawn)
GND on Bottom Layer "GND_L02_P000" (solid, pour order 0): -420,2360 -575,2515 -575,4345 205,4345 655,4795 825,4625 7695,4625 7695,-725 7420,-1000 -910,-1000

## Silkscreen, mask and mechanical layers (free items; w line width, h text height)
Top Overlay:
  drawing of 13 lines, arcs and shapes, not listed
  text "R1-300K" at 4260,3510 h60
  text "C2-0.1uF" at 4180,3330 h60
  text "R2-300K" at 4260,3120 h60
  text "R3-150K" at 4210,2965 h60
  text "R5-100K" at 4955,2765 h60